# Allegro board HY_TYPEC_DBUG_V10A.brd
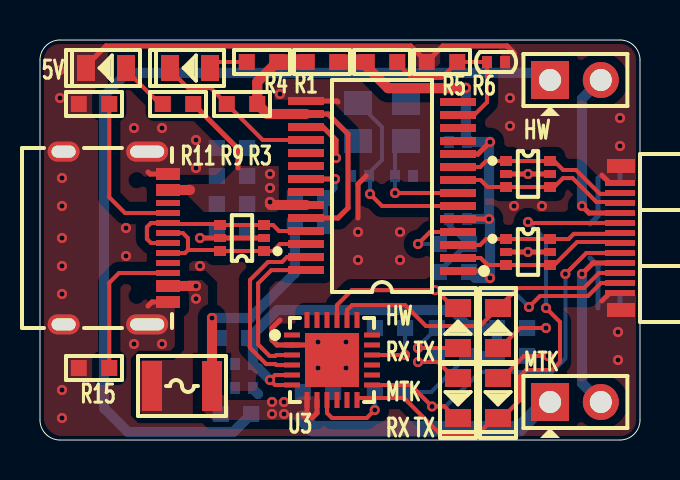
[diagram p0: board, top side]
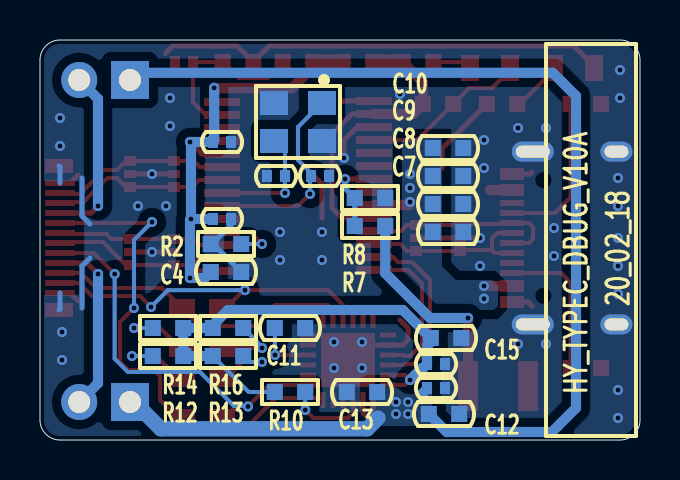
[diagram p1: board, bottom side, seen from below]

Outline 30 x 20 mm; copper layers: TOP, BOTTOM. Coordinates in mm from the lower left corner of the outline.
Outline path: 0,19 0,1 arc(0.29,0.29) 1,0 29,0 arc(29.71,0.29) 30,1 30,19 arc(29.71,19.71) 29,20 1,20 arc(0.29,19.71) 0,19

## Design rules (mm)
constraint set DEFAULT: min track width 0.203, pair gap 0.203
net group GL850_USB_D: nets GL850_USB_DN GL850_USB_DP
net group HW_USB_D: nets HW_USB_DN HW_USB_DP
net group MTK_USB_D: nets MTK_USB_DN MTK_USB_DP
net group USB_D: nets USB_DN USB_DP

## Placement (name value [footprint] x y rotation side)
C1  100nF_50V  [C0402]  22.8 18.9 180 top
C2  18pF_50V  [C0402]  16 13.2 0 bottom
C3  18pF_50V  [C0402]  18.2 13.2 180 bottom
C4  10uF_16V  [C0603]  20.7 8.4 180 bottom
C5  100nF_50V  [C0402]  20.9 14.9 0 bottom
C6  100nF_50V  [C0402]  20.9 11.05 0 bottom
C7  10uF_16V  [C0603]  9.6 10.4 180 bottom
C8  10uF_16V  [C0603]  9.6 11.8 180 bottom
C9  10uF_16V  [C0603]  9.6 13.2 180 bottom
C10  10uF_16V  [C0603]  9.6 14.6 180 bottom
C11  4.7uF_25V  [C0603]  17.5 5.6 180 bottom
C12  10uF_16V  [C0603]  9.8 1.3 0 bottom
C13  10uF_16V  [C0603]  13.9 2.4 180 bottom
C14  100nF_50V  [C0402]  10.2 2.6 0 bottom
C15  10uF_16V  [C0603]  9.7 5.1 0 bottom
C16  100nF_50V  [C0402]  10.2 3.8 0 bottom
D1  LED_GREEN  [LED0805]  7.5 18.6 180 top
D2  LED_GREEN  [LED0805]  3.3 18.6 180 top
D3  LED_RED  [LED0805]  22.9 2.1 270 top
D4  LED_GREEN  [LED0805]  20.9 2.1 270 top
D5  LED_RED  [LED0805]  22.9 5.6 90 top
D6  LED_GREEN  [LED0805]  20.9 5.6 90 top
F1  SMD1210-200  [FUSE1210]  7.1 2.7 0 top
J1  -  [CN1X2-2P54-Z]  25.5 1.9 0 top
J2  -  [CN1X2-2P54-Z]  25.5 18 0 top
NOREF  -  []  0 0 90 top
NOREF#2  -  []  0 0 0 top
R1  0R  [R0603]  14.1 18.9 180 top
R2  680R  [R0603]  20.7 9.8 180 bottom
R3  100K  [R0603]  10.1 16.8 0 top
R4  10K  [R0603]  11.1 18.9 0 top
R5  10K  [R0603]  17.1 18.9 0 top
R6  47K  [R0603]  20.1 18.9 0 top
R7  47K  [R0603]  13.5 10.7 180 bottom
R8  47K  [R0603]  13.5 12.1 0 bottom
R9  10K  [R0603]  6.9 16.8 0 top
R10  10K  [R0603]  17.5 2.4 180 bottom
R11  4.7K  [R0603]  2.7 16.8 0 top
R12  10K  [R0603]  23.6 4.2 180 bottom
R13  10K  [R0603]  20.6 4.2 0 bottom
R14  10K  [R0603]  23.6 5.6 180 bottom
R15  4.7K/NI  [R0603]  2.7 3.6 180 top
R16  10K  [R0603]  20.6 5.6 0 bottom
U1  GL850G  [SSOP28]  17.1 12.7 90 top
U2  X322512MSB4SI  [X-4P-3R2X2R5-SMD]  17.1 15.9 0 bottom
U3  CP2105  [QFN24-4X4X0R5-2R7X2R7]  14.6 4 270 top
U4  TPD4E1U06DCKR  [SOT363]  24.4 13.3 270 top
U5  -  [U261-24XN-4BS60]  29 10.1 270 top
U6  TPD4E1U06DCKR  [SOT363]  24.4 9.4 270 top
U7  TPD4E1U06DCKR  [SOT363]  10.1 10.1 90 top
USB1  -  [TYPE-C-31-M-12]  6.4 10.1 270 top

## Library data of the parts
C1 C5 C6 C11 = CAP NP
C2-C4 C7-C10 C12-C16 = CAP NP_2
D1-D6 = LED_4
F1 = FUSE
J1 J2 = CONN RCPT 2
R1-R16 = R_Generic
U1 = GL850G
U2 = TSX-3225
U3 = CP2105_9
U4 U6 U7 = TPD4E1U06DBVR
U5 = USB-C-24P
USB1 = TYPE-C_16P

## Footprints (pads in the part's own frame, mm; a bottom-side part is the same pattern mirrored in y, then rotated)
C0402
  rect 0.5x0.6 smd: 1(-0.45,0) 2(0.45,0)
C0603
  rect 0.8x0.8 smd: 1(-0.762,0) 2(0.762,0)
CN1X2-2P54-Z
  rect 1.9x1.9 hole 1.1: 1(0,0)
  round 1.8 hole 1.1: 2(2.54,0)
FUSE1210
  rect 1x2.5 smd: 1(-1.5,0) 2(1.5,0)
LED0805
  rect 0.9x1.3 smd: 1(-1,0) 2(1,0)
QFN24-4X4X0R5-2R7X2R7
  rect 0.25x0.8 smd: 1(-1.25,-2) 2(-0.75,-2) 3(-0.25,-2) 4(0.25,-2) 5(0.75,-2) 6(1.25,-2) 13(1.25,2) 14(0.75,2) 15(0.25,2) 16(-0.25,2) 17(-0.75,2) 18(-1.25,2)
  rect 0.8x0.25 smd: 7(2,-1.25) 8(2,-0.75) 9(2,-0.25) 10(2,0.25) 11(2,0.75) 12(2,1.25) 19(-2,1.25) 20(-2,0.75) 21(-2,0.25) 22(-2,-0.25) 23(-2,-0.75) 24(-2,-1.25)
  rect 2.7x2.7 smd: 25(0,0)
R0603
  rect 0.8x0.8 smd: 1(-0.762,0) 2(0.762,0)
SOT363
  rect 0.5x0.6 smd: 1(-0.65,-1.1) 3(0.65,-1.1) 4(0.65,1.1) 6(-0.65,1.1)
  rect 0.4x0.6 smd: 2(0,-1.1) 5(0,1.1)
SSOP28
  rect 0.4x1.8 smd: 1(-4.25,-3.8) 2(-3.6,-3.8) 3(-2.95,-3.8) 4(-2.3,-3.8) 5(-1.65,-3.8) 6(-1,-3.8) 7(-0.35,-3.8) 8(0.3,-3.8) 9(0.95,-3.8) 10(1.6,-3.8) 11(2.25,-3.8) 12(2.9,-3.8) 13(3.55,-3.8) 14(4.2,-3.8) 15(4.25,3.8) 16(3.6,3.8) 17(2.95,3.8) 18(2.3,3.8) 19(1.65,3.8) 20(1,3.8) 21(0.35,3.8) 22(-0.3,3.8) 23(-0.95,3.8) 24(-1.6,3.8) 25(-2.25,3.8) 26(-2.9,3.8) 27(-3.55,3.8) 28(-4.2,3.8)
TYPE-C-31-M-12
  rect 0.6x1.2 smd: 1(-3.2,0) 2(-2.4,0) 11(2.4,0) 12(3.2,0)
  rect 0.3x1.2 smd: 3(-1.75,0) 4(-1.25,0) 5(-0.75,0) 6(-0.25,0) 7(0.25,0) 8(0.75,0) 9(1.25,0) 10(1.75,0)
  oval 1x2.1 hole 0.6x1.7: 13(-4.32,-1.04) 14(4.32,-1.04)
  oval 1x1.6 hole 0.6x1.2: 15(-4.32,-5.22) 16(4.32,-5.22)
U261-24XN-4BS60
  rect 0.7x1.4 smd: 1(-3.6,0.05) 2(3.6,0.05) 3(3.6,0.05) 4(-3.6,0.05)
  rect 0.3x1.5 smd: A1(-2.75,0) A2(-2.25,0) A3(-1.75,0) A4(-1.25,0) A5(-0.75,0) A6(-0.25,0) A7(0.25,0) A8(0.75,0) A9(1.25,0) A10(1.75,0) A11(2.25,0) A12(2.75,0) B1(2.75,0) B2(2.25,0) B3(1.75,0) B4(1.25,0) B5(0.75,0) B6(0.25,0) B7(-0.25,0) B8(-0.75,0) B9(-1.25,0) B10(-1.75,0) B11(-2.25,0) B12(-2.75,0)
X-4P-3R2X2R5-SMD
  rect 1.4x1.2 smd: 1(-1.2,-0.95) 2(1.2,-0.95) 3(1.2,0.95) 4(-1.2,0.95)

## Nets
GND: C1.1 C2.1 C3.1 C4.2 C5.1 C6.1 C7.2 C8.2 C9.2 C10.2 C11.2 C12.1 C13.1 C14.1 C15.1 C16.1 D2.2(CATHODE) R2.1 R6.1 R8.1 R11.1 R15.2 U1.15 U1.17 U2.2 U2.4 U3.2 U3.25 U4.2 U4.5(NC) U5.1 U5.2 U5.3 U5.4 U5.A1 U5.A12 U5.B1 U5.B12 U6.2 U6.5(NC) U7.2 U7.5(NC) USB1.1 USB1.12 USB1.13 USB1.14 USB1.15 USB1.16
VCC_3.3V: C15.2 C16.2 R10.1 R12.2 R13.2 R14.2 R16.2 U3.5(VIO) U3.6
VCC_3.3V_AVDD: C4.1 C5.2 C6.2 R1.1 R5.1 U1.1 U1.5 U1.10
VCC_3.3V_DVDD: R1.2 R3.2 R4.2 U1.16 U1.24
VCC_5V_HW: J2.2 U5.A4
VCC_5V_MTK: J1.2 U5.A9
VCC_5V_OUT: C12.2 C13.2 C14.2 F1.2 J1.1 J2.1 R7.2 U3.7 U3.8
VCC_5V_VBUS: C7.1 C8.1 C9.1 C10.1 F1.1 R9.2 U1.23 USB1.2 USB1.11(VBUS2)
GL850_USB_DN: U1.27 U3.4
GL850_USB_DP: U1.28 U3.3
HW_RX: D6.2(CATHODE) U3.21 U5.A11
HW_TX: D5.2(CATHODE) U3.20 U5.A10
HW_USB_DN: U1.8 U4.3 U4.4 U5.A3
HW_USB_DP: U1.9 U4.1 U4.6 U5.A2
MTK_RX: D4.2(CATHODE) U3.13 U5.A8
MTK_TX: D3.2(CATHODE) U3.12 U5.A5
MTK_USB_DN: U1.2 U5.A7 U6.3 U6.4
MTK_USB_DP: U1.3 U5.A6 U6.1 U6.6
OC1#: R7.1 R8.2 U1.21
PGANG: D1.2(CATHODE) R3.1 U1.18
RESET#: C1.2 R5.2 R6.2 U1.13
USB_DN: U1.25 U7.3 U7.4 USB1.5 USB1.7
USB_DP: U1.26 U7.1 U7.6 USB1.6 USB1.8
X1: C2.2 U1.6 U2.1
X2: C3.2 U1.7(X2) U2.3(OUT2)
N17367996: R2.2 U1.4
N17368086: D1.1 R4.1
N17371022: D2.1 R9.1
N17372101: C11.1 U3.16
N17372183: R10.2 U3.9
N17372305: D3.1 R12.1
N17372330: D4.1 R13.1
N17372355: D5.1 R14.1
N17372378: D6.1 R16.1
N17376069: R11.2 USB1.4
N17377283: R15.1 USB1.10

Pads without a net: U1 11 12 14 19 20 22; U3 1 10 11 14 15 17 18 19 22 23 24; U5 B2 B3 B4 B5 B6 B7 B8 B9 B10 B11; USB1 3 9

## Via types
v1: diameter 0.508, hole 0.254, TOP to BOTTOM, 72 vias

## Routing (per net, layer and track width the routed paths; a pad name or vN(x,y) marks a point on that pad's centre or on a via; arc(x,y) is an arc through that point)
GND: length 56.5
  TOP w0.254: U5.A1 28.49,12.85 28.1,13.24 ; U1.15 14.85,16.95 14.9,16.9 ; U4.2 v1(24.4,13.3) U4.5 ; 23.73,19.33 23.61,19.45 23.36,19.7 20.14,19.7 R6.1 18.54,19.7 3.3,19.7 2.3,18.7 D2.2 ; 5.4,13.4 5.5,13.3 USB1.1 ; 15.9,11.1 15.9,12.8 16.3,13.2 ; 12,6 11.6,5.6 11.6,5 11.85,4.75 U3.2 13.85,4.75 U3.25 ; 28.1,6.96 28.49,7.35 U5.A12 ; U1.17 14.15,15.65 14.8,15 v1(14.8,14.1) ; U6.2 v1(24.4,9.4) U6.5 ; USB1.12 5.6,6.9 5.4,6.7 ; U7.2 U7.5 v1(8,10.1)
  BOTTOM w0.254: 27.9,6.6 27.9,8.7 27.5,9.1 ; U5.A1 29,13.65 U5.1 ; U5.2 29,6.55 U5.A12 ; C6.1 20.45,10.75 21.21,9.99 21.46,9.99 R2.1 21.34,9.8 C4.2 ; 27.9,13.1 27.9,11.2 27.5,10.8
  vias: v1(1,18.5) v1(1,17.1) v1(1.1,13.1) v1(1.1,11.7) v1(1.1,10.1) v1(1.1,8.7) v1(1.1,7.3) v1(1.1,2.5) v1(1.1,1.1) v1(4.3,10.6) v1(4.3,9.2) v1(4.7,15.6) v1(4.7,4.8) v1(6.1,15.6) v1(6.1,4.8) v1(7.8,15) v1(7.8,13.6) v1(8,8.7) v1(12,17.3) v1(13.9,4.9) v1(13.9,3.6) v1(15.3,4.9) v1(15.3,3.6) v1(15.9,10.4) v1(15.9,9) v1(18,10.4) v1(18,9) v1(23.5,17.1) v1(23.5,15.7) v1(23.7,11.7) v1(25.1,11.7) v1(28.9,5.4) v1(28.9,4) v1(29,16.1) v1(29,14.7)
VCC_3.3V: length 25.1
  TOP w0.203: U3.5 11.75,3.25 v1(11.5,3) 11.75,2.75 U3.6
  BOTTOM w0.203: R10.1 19.56,2.4 R13.2
  BOTTOM w0.508: v1(11.5,3) 10.9,3.6 10.85,3.6 C16.2 10.65,4.71 10.46,4.9 C15.2 11.86,6.5 20.6,6.5 21.36,5.74 R16.2 R14.2 R12.2 R13.2
VCC_3.3V_AVDD: length 25.2
  TOP w0.254: U1.10 21.9,14.3 v1(22.5,14.9) ; U1.1 22.15,8.45 v1(22.5,8.1) ; U1.5 v1(22.45,11.05)
  TOP w0.508: v1(21.29,17.61) 21.28,17.59 17.41,17.59 16.34,18.66 R5.1
  TOP w0.762: R1.1 R5.1
  BOTTOM w0.508: v1(21.29,17.61) 21.29,14.96 C5.2 v1(22.5,14.9) 22.45,14.85 v1(22.45,11.05) ; C4.1 21.76,8.1 v1(22.5,8.1) 22.5,11 v1(22.45,11.05) ; v1(22.45,11.05) C6.2
VCC_3.3V_DVDD: length 15.2
  TOP w0.254: U1.24 14.9,11.1 15.4,11.6 15.4,15.3 14.4,16.3 U1.16
  TOP w0.508: U1.16 11.36,16.3 R3.2 10.86,17.9 R4.2
  TOP w0.762: R4.2 R1.2
VCC_5V_HW: length 8.7
  TOP w0.254: U5.A4 27.45,11.35 v1(27.1,11.7)
  BOTTOM w0.508: v1(27.1,11.7) 27.1,17.06 J2.2
VCC_5V_MTK: length 8.9
  TOP w0.254: v1(27.1,8.3) 27.65,8.85 U5.A9
  BOTTOM w0.508: v1(27.1,8.3) 27.1,2.84 J1.2
VCC_5V_OUT: length 73
  TOP w0.254: 13.2,1.2 13.35,1.35 U3.7 ; U3.8 13.85,1.35 13.6,1.1
  TOP w0.508: v1(8.6,6.1) F1.2
  BOTTOM w0.508: C12.2 9.66,0.4 4.4,0.4 3.2,1.6 3.2,17.2 4.36,18.36 24.74,18.36 25.1,18 J2.1 ; R7.2 12.74,8.34 10.5,6.1 v1(8.6,6.1) ; 10.9,2.3 10.65,2.55 C14.2
  BOTTOM w0.762: J1.1 25.3,1.9 23.96,0.56 13.64,0.56 13.1,1.1
  vias: v1(11.6,1.9) v1(11.6,1.3) v1(12.2,1.9) v1(12.2,1.3)
VCC_5V_VBUS: length 8.5
  TOP w0.254: 9.9,13.6 9.9,14.56 R9.2
  TOP w0.508: U1.23 11.55,11.75 11.5,11.8 v1(11.5,11.9) ; USB1.2 7.5,12.5 ; USB1.11 v1(7.8,7.7)
  vias: v1(7.8,7.07) v1(11.5,13.3) v1(11.5,12.6)
GL850_USB_DN: length 9.1
  TOP w0.203: U1.27 12.35,9.15 12.1,8.9 11.4,8.9 10.5,8 10.5,4.61 11.31,3.8 11.77,3.8 11.81,3.75 U3.4
GL850_USB_DP: length 7.7
  TOP w0.203: U1.28 13.29,8.49 11.57,8.49 10.91,7.83 10.91,4.78 11.48,4.2 11.77,4.2 11.81,4.25 U3.3
HW_RX: length 17.6
  TOP w0.203: U5.A11 28.05,7.85 27.4,7.2 25,7.2 v1(24.45,6.65) ; U3.21 14.85,6.75 15.59,7.49 v1(19.75,7.49) 19.81,7.49 20.7,6.6 D6.2
  BOTTOM w0.203: v1(24.45,6.65) 23.61,7.49 v1(19.75,7.49)
HW_TX: length 15.8
  TOP w0.203: U5.A10 27.95,8.35 27.2,7.6 23.9,7.6 D5.2 22,5.7 19.3,5.7 18.26,6.74 15.6,6.74 15.35,6.49 U3.20
HW_USB_DN: length 8.9
  TOP w0.203: U5.A3 28.95,11.9 27.83,11.9 26.63,13.09 26.15,13.09 25.71,12.65 U4.4 U4.3 22.38,12.65 22.03,13 U1.8
HW_USB_DP: length 8.9
  TOP w0.203: U1.9 22,13.65 22.3,13.95 U4.1 U4.6 25.71,13.95 26.16,13.5 26.8,13.5 27.99,12.31 28.96,12.31 U5.A2
MTK_RX: length 20
  TOP w0.203: U3.13 18.53,2.75 v1(19.6,1.68) 20.22,1.68 20.8,1.1 D4.2 ; v1(26.27,8.3) 27.32,9.35 U5.A8
  BOTTOM w0.203: v1(19.6,1.68) 19.62,1.7 20.3,1.7 22,3.4 25.6,3.4 26.27,4.07 v1(26.27,8.3)
MTK_TX: length 25.4
  TOP w0.203: v1(25.3,6.6) 26,5.9 26,3.9 25.6,3.5 24.3,3.5 24,3.2 24,2 23.1,1.1 D3.2 22.7,1.1 21.9,0.3 20,0.3 18.2,2.1 15.95,2.1 U3.12 ; v1(24.4,10.9) 24.45,10.85 U5.A5
  BOTTOM w0.203: v1(25.3,6.6) 25.3,10 v1(24.4,10.9)
MTK_USB_DN: length 8.7
  TOP w0.203: U1.2 22.03,9.1 22.3,8.83 22.31,8.83 22.39,8.75 U6.3 U6.4 25.71,8.75 26.86,9.9 28.95,9.9 U5.A7
MTK_USB_DP: length 8.3
  TOP w0.203: U5.A6 28.96,10.31 26.69,10.31 26.43,10.05 U6.6 U6.1 22.3,10.05 22,9.75 U1.3
OC1#: length 4
  TOP w0.254: U1.21 v1(14.75,13.05)
  BOTTOM w0.254: v1(14.75,13.05) 14.75,12.59 R8.2 R7.1
PGANG: length 8.3
  TOP w0.203: U1.18 11.14,15 R3.1 8.54,17.6 7.4,17.6 6.5,18.5 D1.2
RESET#: length 8.9
  TOP w0.203: R5.2 17.86,18.84 18.6,18.1 20.06,18.1 R6.2 C1.2 22.35,16.89 21.71,16.25 U1.13
USB_DN: length 9.9
  TOP w0.203: U1.25 11.95,10.45 11.65,10.75 U7.3 U7.4 8.95,10.8 6.45,10.8 USB1.5 5.55,10.85 5.35,10.65 5.35,10.05 5.55,9.85 USB1.7
USB_DP: length 8.8
  TOP w0.203: U1.26 12,9.8 11.65,9.45 U7.1 U7.6 8.95,9.5 7.4,9.5 ; USB1.8 7.25,9.35 7.4,9.5 ; 7.4,9.5 7.4,10.09 7.14,10.35 USB1.6
X1: length 10
  TOP w0.203: U1.6 17.1,11.7 v1(16.5,12.3)
  BOTTOM w0.203: U2.1 17.1,15.65 17.1,14 16.45,13.35 C2.2 16.5,13.15 v1(16.5,12.3)
X2: length 6
  TOP w0.203: U1.7 v1(17.75,12.35)
  BOTTOM w0.203: U2.3 17.75,14.4 C3.2 v1(17.75,12.35)
N17367996: length 3.3
  TOP w0.203: v1(18.9,9.8) 19.5,10.4 U1.4
  BOTTOM w0.203: v1(18.9,9.8) R2.2
N17368086: length 2
  TOP w0.203: R4.1 8.8,18.9 D1.1
N17371022: length 2.6
  TOP w0.203: D2.1 4.3,18.5 6,16.8 R9.1
N17372101: length 3
  TOP w0.203: U3.16 v1(18.25,4.25)
  BOTTOM w0.203: C11.1 18.25,5.59 v1(18.25,4.25)
N17372183: length 4.2
  TOP w0.203: U3.9 14.35,1.35 14.6,1.1 16.34,1.1 v1(16.74,1.5)
  BOTTOM w0.203: v1(16.74,1.5) R10.2
N17372305: length 4
  TOP w0.203: D3.1 23.1,3.1 24.2,4.2 v1(25.4,4.2)
  BOTTOM w0.203: v1(25.4,4.2) R12.1
N17372330: length 3.4
  TOP w0.203: v1(18.9,3.9) 19.9,3.9 20.7,3.1 D4.1
  BOTTOM w0.203: R13.1 19.54,3.9 v1(18.9,3.9)
N17372355: length 3.8
  TOP w0.203: D5.1 23,4.6 24,5.6 v1(25.3,5.6)
  BOTTOM w0.203: v1(25.3,5.6) R14.1
N17372378: length 3.4
  TOP w0.203: D6.1 v1(18.9,4.6)
  BOTTOM w0.203: v1(18.9,4.6) 18.9,4.66 R16.1
N17376069: length 7.9
  TOP w0.203: R11.2 3.46,12.14 4.25,11.35 USB1.4
N17377283: length 7.4
  TOP w0.203: USB1.10 3.95,8.35 3.46,7.86 R15.1

## Copper pours and planes (outline as drawn; the poured copper is in the pictures)
GND on TOP: 0.2,19 0.43,19.57 1,19.8 29,19.8 29.57,19.57 29.8,19 29.8,1 29.57,0.43 29,0.2 1,0.2 0.47,0.47 0.2,1 ; 5 cut-outs
GND on BOTTOM: 0.2,19 0.43,19.57 1,19.8 29,19.8 29.57,19.57 29.8,19 29.8,1 29.57,0.43 29,0.2 1,0.2 0.47,0.47 0.2,1 ; 2 cut-outs
VCC_5V_OUT on TOP: 14,2.4 14,1.2 13.8,1 8.6,1 8.1,1.5 8.1,3.9 9.1,3.9 9.1,2.3 9.4,2 12.8,2 13.2,2.4
VCC_5V_OUT on BOTTOM: 10.4,2.6 10.4,0.8 10.5,0.7 13.3,0.7 13.5,0.9 13.5,2.5 13.4,2.6
VCC_5V_VBUS on TOP: 5.8,12.8 9,12.8 9.9,13.7 11.9,13.7 12.1,13.5 12.1,11.7 11.8,11.4 8.2,11.4 7.4,12.2 5.8,12.2
VCC_5V_VBUS on TOP: 5.8,8 8.1,8 8.4,7.7 8.4,1.8 7.9,1.3 5.1,1.3 5,1.4 5,3.9 5.1,4 6.7,4 7.2,4.5 7.2,7.1 6.9,7.4 5.8,7.4
VCC_5V_VBUS on BOTTOM: 7.3,6.5 9.9,6.5 11.9,8.5 11.9,14.9 11.7,15.1 9.9,15.1 9.9,13.6 9.95,13.55 9.9,13.5 9.9,8.7 9.2,8 7.4,8 7.1,7.7 7.1,6.7

## Text on the board
Ref Des/Silkscreen Bottom: 20_02_18 | HY_TYPEC_DBUG_V10A
Ref Des/Silkscreen Top: 5V | HW | RX | MTK | TX
BODY_CENTER: FIGURE | FINISHED_SIZE | 0.254 | 1.1 | 1.2x0.6 | 1.7x0.6 | DRILL CHART: TOP to BOTTOM | ALL UNITS ARE IN MILLIMETERS | PLATED | QTY | 72 | 4 | 2 | 80 | TOTAL HOLES:
